# EAGLE board SENSOR_BOARD (EAGLE 9.5.2)
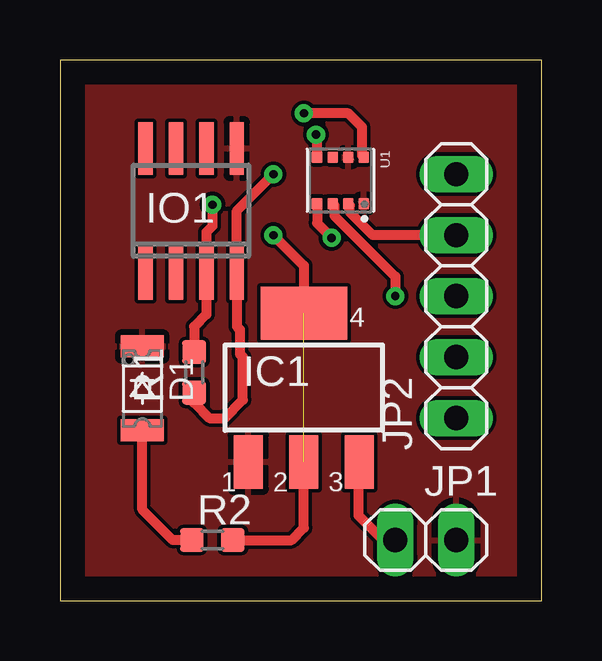
[diagram p0: board, top side]
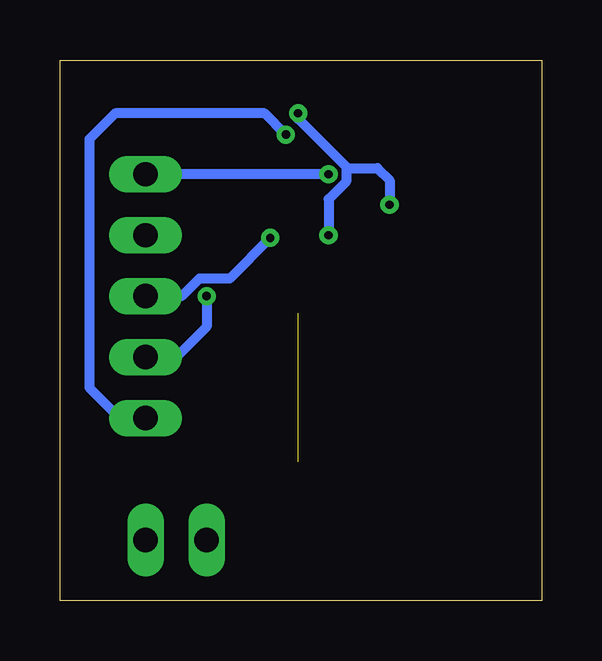
[diagram p1: board, bottom side, seen from below]

Size 20.08 x 22.54 mm. Coordinates in mm from the lower left corner, seen from the top.
Outline: 0,0 20.08,0 20.08,22.54 0,22.54 0,0
Copper layers (1*16): Top 0.035mm / dielectric 1.5mm / Bottom 0.035mm
Design rules "default *": minimum track width 6mil, minimum drill 0.35mm, track to track 6mil, track to pad 6mil, pad to pad 6mil, via to via 6mil, smd to smd 6mil, copper to edge 40mil, drill to drill 6mil, minimum pad ring 10mil, minimum via ring 8mil, stop-mask expansion 4mil, vias tented up to drill 0mil, thermal gap 10mil
tRestrict: 4 lines

## Footprints (pad centres in the part's own frame; a part is rotated, then mirrored left to right if it is on the bottom)
P1206 = smd 0.914 x 1.778: A -1.905,0; K 1.587,0
SOT223 = smd 1.219 x 2.235: 1 -2.311,-3.099; 2 0,-3.099; 3 2.311,-3.099 | smd 3.6 x 2.2: 4 0,3.099
SO08 = smd 0.6 x 2.2: 1 -1.905,-2.6; 2 -0.635,-2.6; 3 0.635,-2.6; 4 1.905,-2.6; 5 1.905,2.6; 6 0.635,2.6; 7 -0.635,2.6; 8 -1.905,2.6
1X02 = drill 1.016 long: 1 -1.27,0; 2 1.27,0
1X05 = drill 1.016 long: 1 -5.08,0; 2 -2.54,0; 3 0,0; 4 2.54,0; 5 5.08,0
R0603 = smd 1 x 1: 1 -0.85,0; 2 0.85,0
PSON65P250X250X100-8N = smd 0.49 x 0.45: 1 0.97,0.975; 2 0.97,0.325; 3 0.97,-0.325; 4 0.97,-0.975; 5 -0.97,-0.975; 6 -0.97,-0.325; 7 -0.97,0.325; 8 -0.97,0.975

## Placement (x,y rotation side)
D1  LED_SMD_1206  [P1206]  3.43,9.02 90 top
IC1  IC1  [SOT223]  10.16,8.89 0 top
IO1  IC2  [SO08]  5.46,16.26 0 top
JP1  [1X02]  15.24,2.54 0 top
JP2  [1X05]  16.51,12.7 90 top
R1  4.7k  [R0603]  5.59,9.53 90 top
R2  1k  [R0603]  6.35,2.54 0 top
U1  IC3  [PSON65P250X250X100-8N]  11.68,17.53 270 top

## Library data of the parts
D1 IO1 = #PaJa_30
IC1 = lm1117; MF: Texas Instruments; MPN: LM1117MP-3.3; OC_FARNELL: 9778195; OC_NEWARK: 28X3416
JP1 JP2 = pinhead
R1 R2 = rcl_upravena
U1 = BME280; AVAILABILITY: Unavailable; DESCRIPTION: Humidity Temperature Sensor 0 ~ 100% RH I²C, SPI ±3% 1s Surface Mount; MF: Bosch; MP: BME280; PACKAGE: LGA-8 Bosch; PRICE: None

## Nets
+3V3: IC1.2 IC1.4 IO1.3 R1.2 R2.2 U1.8
CHIP_SELECT: JP2.4 U1.2
CLK: JP2.3 U1.4
GND: D1.K IC1.1 IO1.5 JP1.2 U1.1 U1.7
MISO: JP2.1 U1.5
MOSI: JP2.2 U1.3
N$1: D1.A R2.1
ONE_WIRE: IO1.4 JP2.5 R1.1
VCC: IC1.3 JP1.1
VDDIO: U1.6

## Tracks (layer width: path | path; a pad name or v marks a point on that pad's centre or on a via)
+3V3  (via drill 0.35)  (1 unrouted)
  Top 0.406: IC1.2 10.16,3.05 9.65,2.54 R2.2 | U1.8 12.59,18.57 12.59,19.74 12.01,20.32 v10.16,20.32 | v8.89,15.24 10.16,13.97 IC1.4 | v6.35,16.51 6.35,15.62 6.1,15.37 IO1.3 6.1,11.94 5.59,11.43 R1.2
  Bottom 0.406: 8.16,18.08 8.16,17.48 8.89,16.74 v8.89,15.24 | v10.16,20.32 10.16,20.09 8.16,18.08 | 8.16,18.08 8.11,18.03 6.86,18.03 6.35,17.53 v6.35,16.51
CHIP_SELECT
  Top 0.406: U1.2 12.08,16.49 12.08,16.2 13.04,15.24 JP2.4
CLK  (via drill 0.35)
  Top 0.406: U1.4 10.71,15.74 v11.32,15.13
  Bottom 0.406: v11.32,15.13 13.01,13.43 14.27,13.43 15.01,12.7 JP2.3
GND
  pour Top: -1.27,24.13 21.59,24.13 21.59,-1.27 -1.27,-1.27
MISO  (via drill 0.35)
  Top 0.406: U1.5 10.71,19.39 v10.67,19.43
  Bottom 0.406: v10.67,19.43 11.56,20.32 17.78,20.32 18.86,19.24 18.86,8.89 17.59,7.62 JP2.1
MOSI  (via drill 0.35)
  Top 0.406: U1.3 11.43,16.49 11.43,16.06 13.97,13.52 v13.97,12.7
  Bottom 0.406: v13.97,12.7 13.97,11.43 15.24,10.16 JP2.2
N$1
  Top 0.406: R2.1 4.7,2.54 3.43,3.81 D1.A | D1.A
ONE_WIRE  (via drill 0.35)
  Top 0.406: v8.89,17.78 7.37,16.26 IO1.4 7.37,11.43 7.49,11.3 7.49,10.29 7.62,10.16 7.62,8.38 6.86,7.62 6.22,7.62 5.59,8.26 R1.1
  Bottom 0.406: v8.89,17.78 JP2.5
VCC
  Top 0.406: JP1.1 13.46,2.54 12.45,3.56 12.45,5.77 IC1.3